# EAGLE board Qwiic PHT Sensor - MS8607-Panel (EAGLE 9.5.2), part 1 of 4
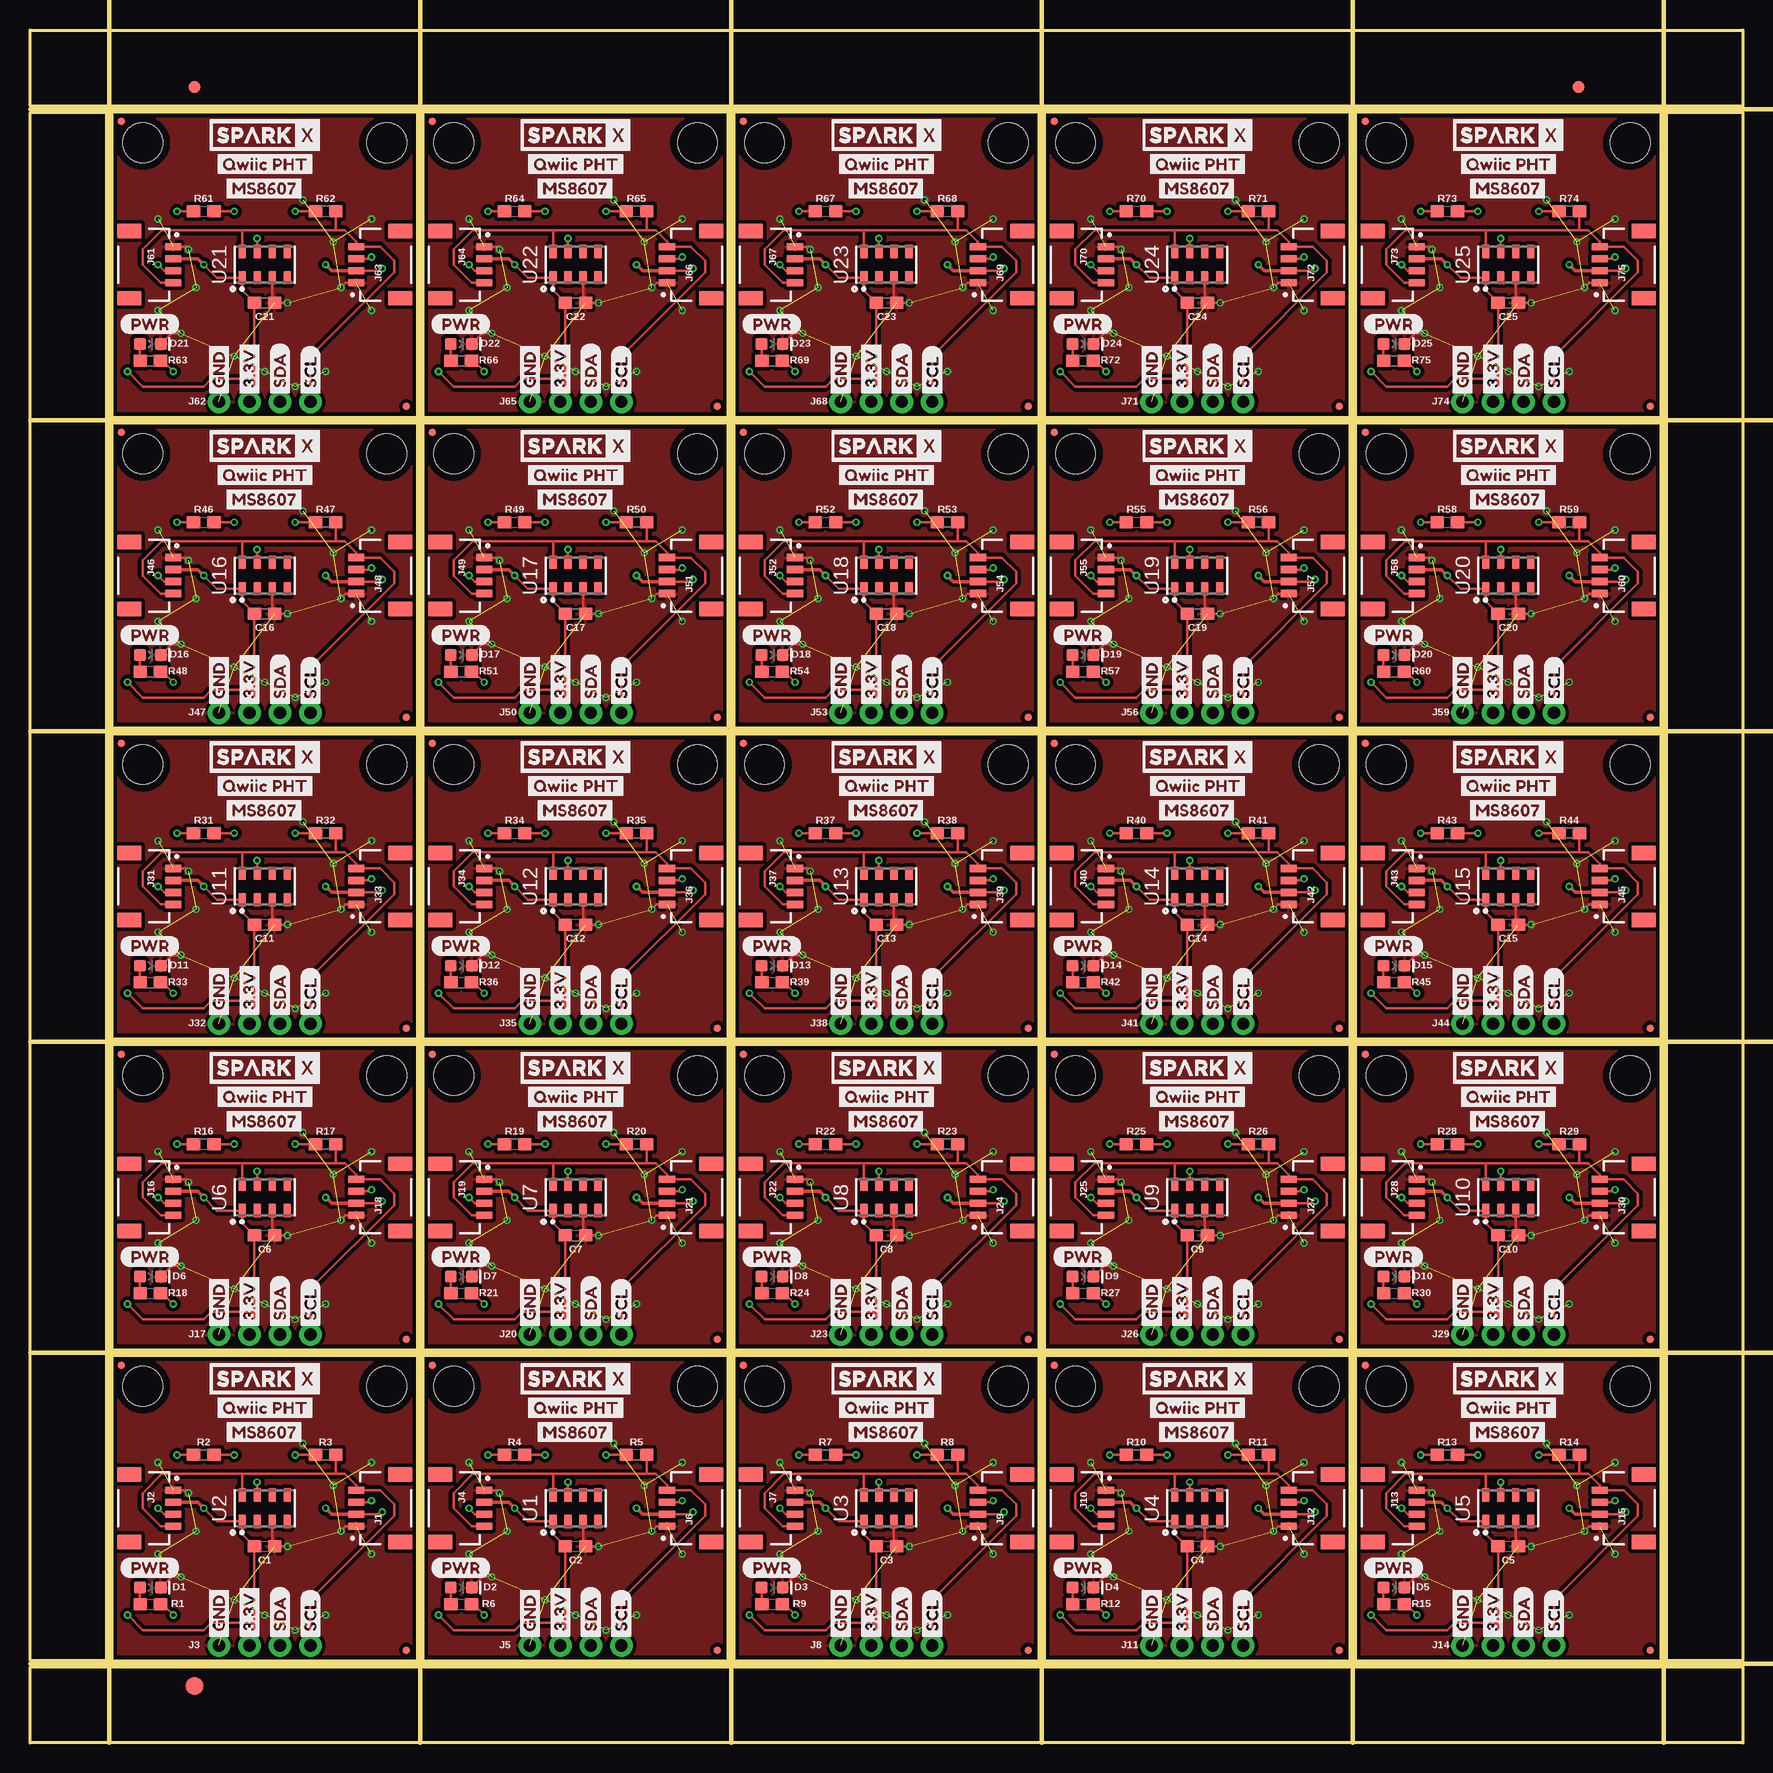
[diagram p0: board, top side]
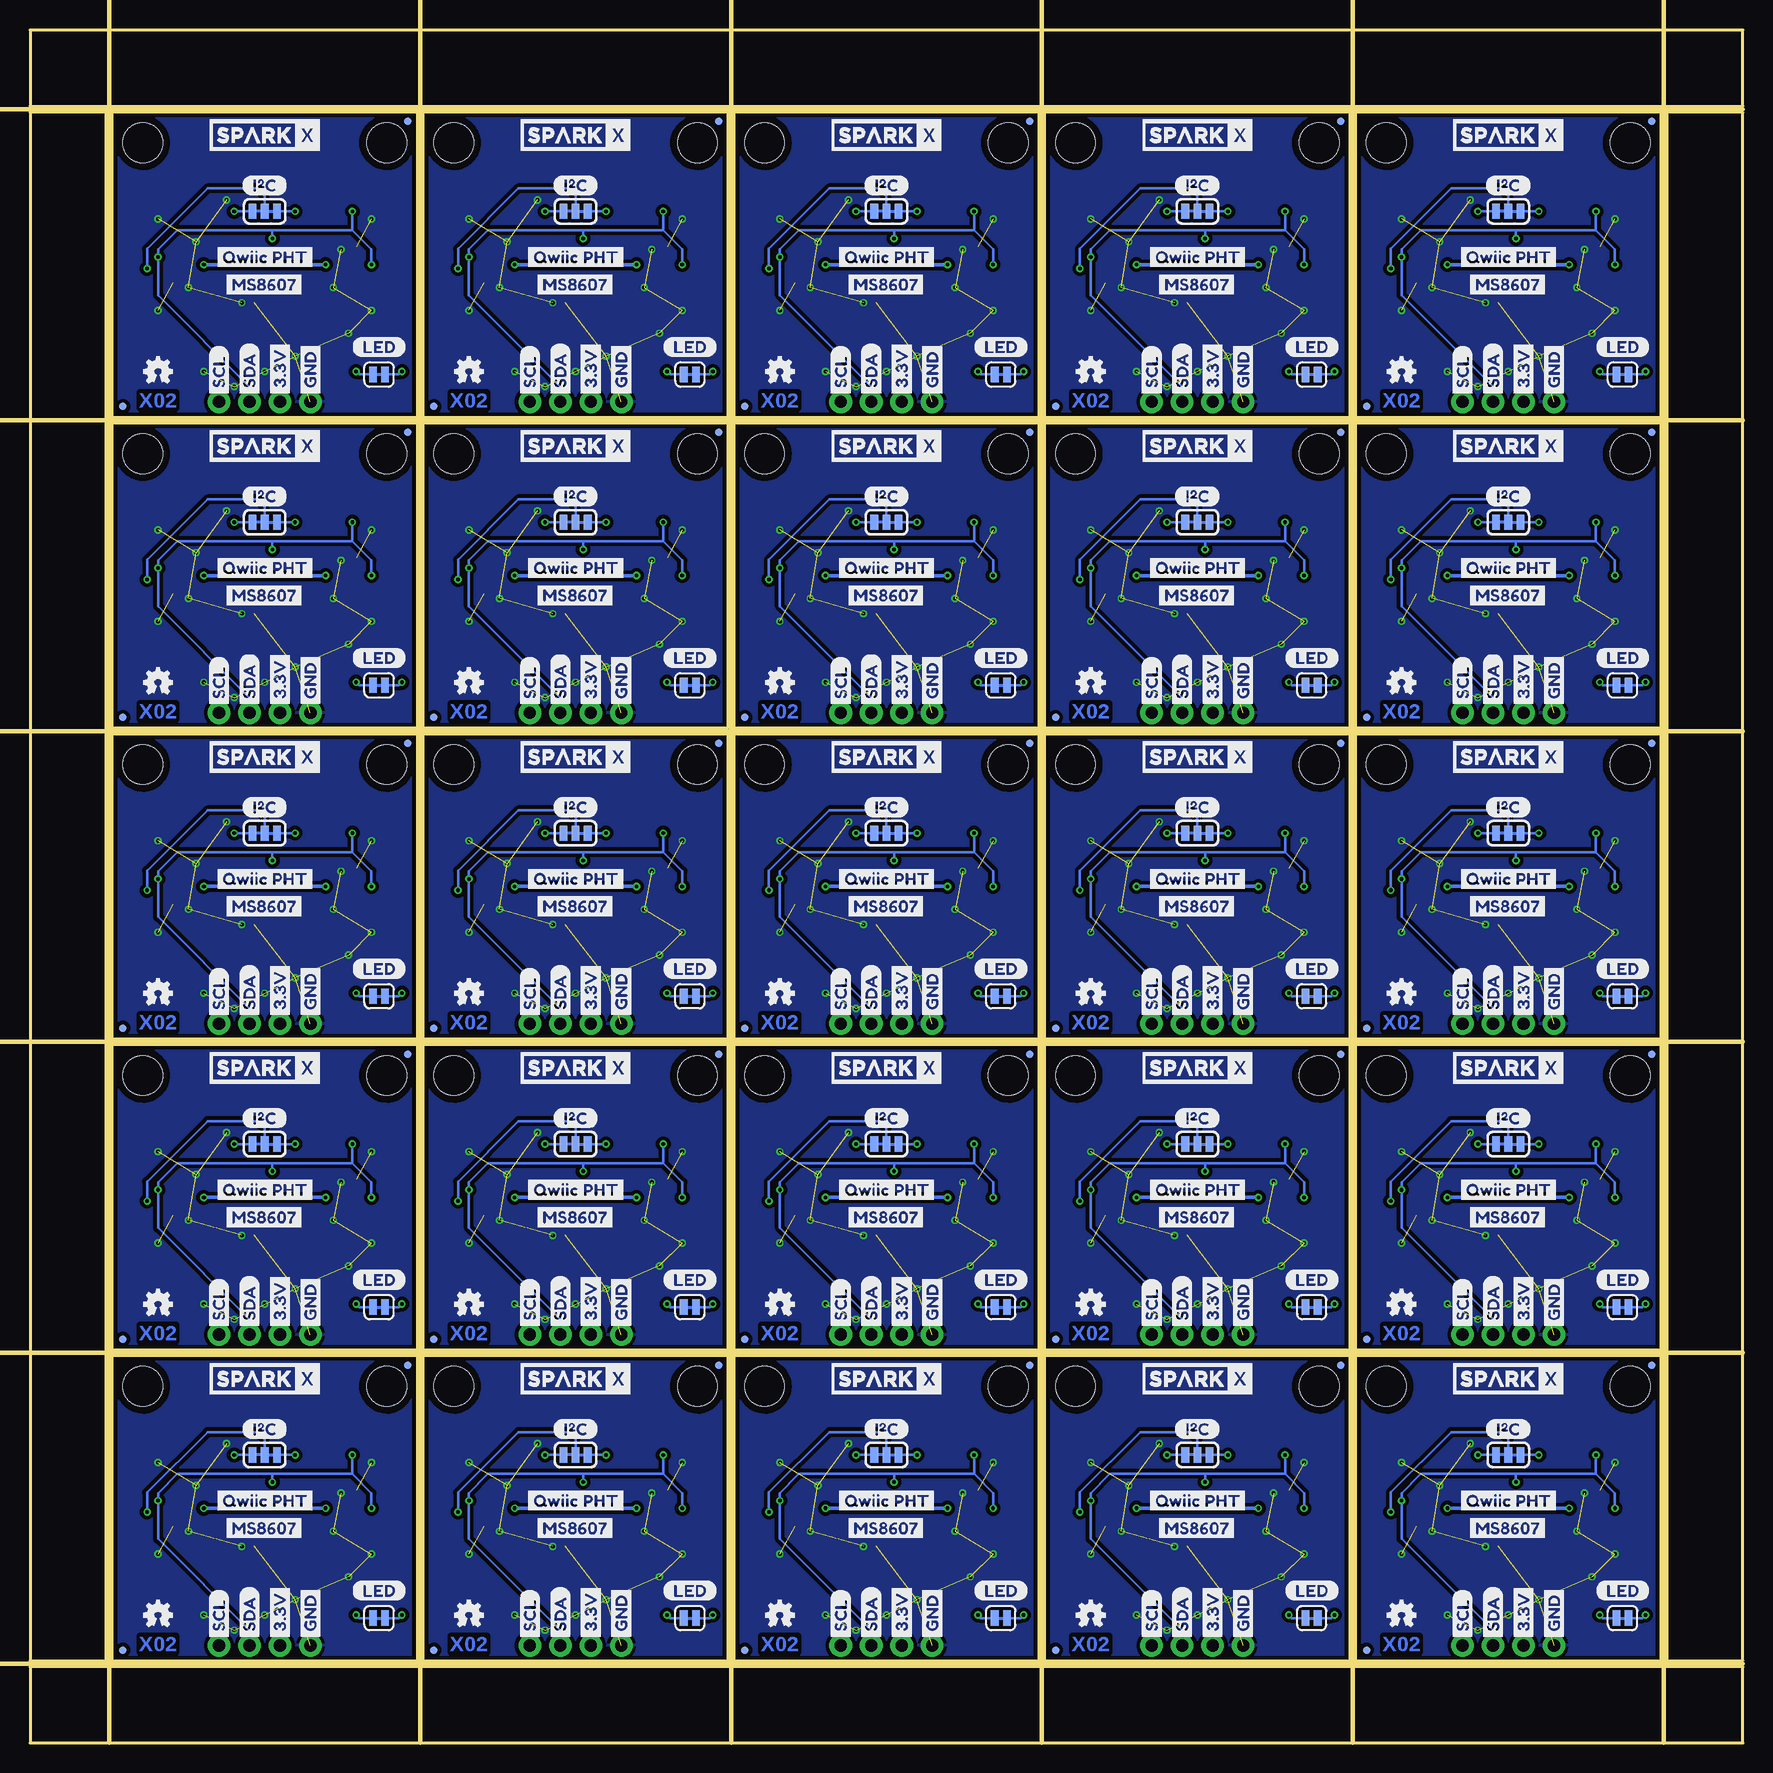
[diagram p1: board, bottom side, seen from below]

Size 142.75 x 142.75 mm. Coordinates in mm from the lower left corner, seen from the top.
Outline: 6.86,6.86 6.86,32.26 32.26,32.26 32.26,6.86 6.86,6.86
Outline: 32.77,6.86 32.77,32.26 58.17,32.26 58.17,6.86 32.77,6.86
Outline: 58.67,6.86 58.67,32.26 84.07,32.26 84.07,6.86 58.67,6.86
Outline: 84.58,6.86 84.58,32.26 109.98,32.26 109.98,6.86 84.58,6.86
Outline: 110.49,6.86 110.49,32.26 135.89,32.26 135.89,6.86 110.49,6.86
Outline: 6.86,32.77 6.86,58.17 32.26,58.17 32.26,32.77 6.86,32.77
Outline: 32.77,32.77 32.77,58.17 58.17,58.17 58.17,32.77 32.77,32.77
Outline: 58.67,32.77 58.67,58.17 84.07,58.17 84.07,32.77 58.67,32.77
Outline: 84.58,32.77 84.58,58.17 109.98,58.17 109.98,32.77 84.58,32.77
Outline: 110.49,32.77 110.49,58.17 135.89,58.17 135.89,32.77 110.49,32.77
Outline: 6.86,58.67 6.86,84.07 32.26,84.07 32.26,58.67 6.86,58.67
Outline: 32.77,58.67 32.77,84.07 58.17,84.07 58.17,58.67 32.77,58.67
Outline: 58.67,58.67 58.67,84.07 84.07,84.07 84.07,58.67 58.67,58.67
Outline: 84.58,58.67 84.58,84.07 109.98,84.07 109.98,58.67 84.58,58.67
Outline: 110.49,58.67 110.49,84.07 135.89,84.07 135.89,58.67 110.49,58.67
Outline: 6.86,84.58 6.86,109.98 32.26,109.98 32.26,84.58 6.86,84.58
Outline: 32.77,84.58 32.77,109.98 58.17,109.98 58.17,84.58 32.77,84.58
Outline: 58.67,84.58 58.67,109.98 84.07,109.98 84.07,84.58 58.67,84.58
Outline: 84.58,84.58 84.58,109.98 109.98,109.98 109.98,84.58 84.58,84.58
Outline: 110.49,84.58 110.49,109.98 135.89,109.98 135.89,84.58 110.49,84.58
Outline: 6.86,110.49 6.86,135.89 32.26,135.89 32.26,110.49 6.86,110.49
Outline: 32.77,110.49 32.77,135.89 58.17,135.89 58.17,110.49 32.77,110.49
Outline: 58.67,110.49 58.67,135.89 84.07,135.89 84.07,110.49 58.67,110.49
Outline: 84.58,110.49 84.58,135.89 109.98,135.89 109.98,110.49 84.58,110.49
Outline: 110.49,110.49 110.49,135.89 135.89,135.89 135.89,110.49 110.49,110.49
Outline: 0,6.35 142.75,6.35 142.75,0 0,0 0,6.35
Outline: 136.4,135.89 142.75,135.89 142.75,6.86 136.4,6.86 136.4,135.89
Outline: 0,142.75 142.75,142.75 142.75,136.4 0,136.4 0,142.75
Outline: 0,135.89 6.35,135.89 6.35,6.86 0,6.86 0,135.89
Copper layers (1*16): Top 0.035mm / dielectric 1.5mm / Bottom 0.035mm
Design rules "SparkFun-2-layer-PCBWay-LIMIT": minimum track width 6mil, minimum drill 0.3mm, track to track 6mil, track to pad 6mil, pad to pad 6mil, via to via 6mil, smd to smd 6mil, copper to edge 6mil, drill to drill 6mil, minimum pad ring 6mil, minimum via ring 6mil, stop-mask expansion 4mil, vias tented up to drill 25mil, thermal gap 10mil
Milling: 12 lines

## Footprints (pad centres in the part's own frame; a part is rotated, then mirrored left to right if it is on the bottom)
0603 = smd 1.1 x 1: 1 -0.85,0; 2 0.85,0
LED-0603 = smd 1 x 1: A -0.877,0; C 0.877,0
FIDUCIAL-1X2 = smd 1 x 1: 1 0,0
FIDUCIAL-1.5X3 = smd 1.5 x 1.5: 1 0,0
SMT-JUMPER_3_2-NC_TRACE_SILK = smd 0.635 x 1.27: 1 -1.016,0; 2 0,0; 3 1.016,0
JST04_1MM_RA = smd 0.6 x 1.35: 1 -1.5,0; 2 -0.5,0; 3 0.5,0; 4 1.5,0 | smd 1.2 x 2: NC1 2.8,-3.675; NC2 -2.8,-3.675
1X04_NO_SILK = drill 1.016 pad 1.88: 1 0,0; 2 2.54,0; 3 5.08,0; 4 7.62,0
MICRO-FIDUCIAL = smd 0.635 x 0.635: 1 0,0
STAND-OFF = hole 3.302: 0,0
SMT-JUMPER_2_NC_TRACE_SILK = smd 0.635 x 1.27: 1 -0.508,0; 2 0.508,0
MS8607-02BA01 = smd 1.1 x 0.6: 1 -1.1,1.875; 2 -1.1,0.625; 3 -1.1,-0.625; 4 -1.1,-1.875; 5 1.1,-1.875; 6 1.1,-0.625; 7 1.1,0.625; 8 1.1,1.875

## Placement (x,y rotation side)
C1  0.22uF  [0603]  19.56,16.38 0 top
C2  0.22uF  [0603]  45.47,16.38 0 top
C3  0.22uF  [0603]  71.37,16.38 0 top
C4  0.22uF  [0603]  97.28,16.38 0 top
C5  0.22uF  [0603]  123.19,16.38 0 top
C6  0.22uF  [0603]  19.56,42.29 0 top
C7  0.22uF  [0603]  45.47,42.29 0 top
C8  0.22uF  [0603]  71.37,42.29 0 top
C9  0.22uF  [0603]  97.28,42.29 0 top
C10  0.22uF  [0603]  123.19,42.29 0 top
C11  0.22uF  [0603]  19.56,68.2 0 top
C12  0.22uF  [0603]  45.47,68.2 0 top
C13  0.22uF  [0603]  71.37,68.2 0 top
C14  0.22uF  [0603]  97.28,68.2 0 top
C15  0.22uF  [0603]  123.19,68.2 0 top
C16  0.22uF  [0603]  19.56,94.11 0 top
C17  0.22uF  [0603]  45.47,94.11 0 top
C18  0.22uF  [0603]  71.37,94.11 0 top
C19  0.22uF  [0603]  97.28,94.11 0 top
C20  0.22uF  [0603]  123.19,94.11 0 top
C21  0.22uF  [0603]  19.56,120.02 0 top
C22  0.22uF  [0603]  45.47,120.02 0 top
C23  0.22uF  [0603]  71.37,120.02 0 top
C24  0.22uF  [0603]  97.28,120.02 0 top
C25  0.22uF  [0603]  123.19,120.02 0 top
D1  RED  [LED-0603]  10.03,12.95 0 top
D2  RED  [LED-0603]  35.94,12.95 0 top
D3  RED  [LED-0603]  61.85,12.95 0 top
D4  RED  [LED-0603]  87.76,12.95 0 top
D5  RED  [LED-0603]  113.67,12.95 0 top
D6  RED  [LED-0603]  10.03,38.86 0 top
D7  RED  [LED-0603]  35.94,38.86 0 top
D8  RED  [LED-0603]  61.85,38.86 0 top
D9  RED  [LED-0603]  87.76,38.86 0 top
D10  RED  [LED-0603]  113.67,38.86 0 top
D11  RED  [LED-0603]  10.03,64.77 0 top
D12  RED  [LED-0603]  35.94,64.77 0 top
D13  RED  [LED-0603]  61.85,64.77 0 top
D14  RED  [LED-0603]  87.76,64.77 0 top
D15  RED  [LED-0603]  113.67,64.77 0 top
D16  RED  [LED-0603]  10.03,90.68 0 top
D17  RED  [LED-0603]  35.94,90.68 0 top
D18  RED  [LED-0603]  61.85,90.68 0 top
D19  RED  [LED-0603]  87.76,90.68 0 top
D20  RED  [LED-0603]  113.67,90.68 0 top
D21  RED  [LED-0603]  10.03,116.59 0 top
D22  RED  [LED-0603]  35.94,116.59 0 top
D23  RED  [LED-0603]  61.85,116.59 0 top
D24  RED  [LED-0603]  87.76,116.59 0 top
D25  RED  [LED-0603]  113.67,116.59 0 top
E$1  [FIDUCIAL-1X2]  13.72,137.99 0 top
E$2  [FIDUCIAL-1X2]  129.03,137.99 0 top
E$3  [FIDUCIAL-1.5X3]  13.72,4.76 0 top
I2C  JUMPER-SMT_3_2-NC_TRACE_SILK  [SMT-JUMPER_3_2-NC_TRACE_SILK]  19.56,24 0 bottom
I2C1  JUMPER-SMT_3_2-NC_TRACE_SILK  [SMT-JUMPER_3_2-NC_TRACE_SILK]  45.47,24 0 bottom
I2C2  JUMPER-SMT_3_2-NC_TRACE_SILK  [SMT-JUMPER_3_2-NC_TRACE_SILK]  71.37,24 0 bottom
I2C3  JUMPER-SMT_3_2-NC_TRACE_SILK  [SMT-JUMPER_3_2-NC_TRACE_SILK]  97.28,24 0 bottom
I2C4  JUMPER-SMT_3_2-NC_TRACE_SILK  [SMT-JUMPER_3_2-NC_TRACE_SILK]  123.19,24 0 bottom
I2C5  JUMPER-SMT_3_2-NC_TRACE_SILK  [SMT-JUMPER_3_2-NC_TRACE_SILK]  19.56,49.91 0 bottom
I2C6  JUMPER-SMT_3_2-NC_TRACE_SILK  [SMT-JUMPER_3_2-NC_TRACE_SILK]  45.47,49.91 0 bottom
I2C7  JUMPER-SMT_3_2-NC_TRACE_SILK  [SMT-JUMPER_3_2-NC_TRACE_SILK]  71.37,49.91 0 bottom
I2C8  JUMPER-SMT_3_2-NC_TRACE_SILK  [SMT-JUMPER_3_2-NC_TRACE_SILK]  97.28,49.91 0 bottom
I2C9  JUMPER-SMT_3_2-NC_TRACE_SILK  [SMT-JUMPER_3_2-NC_TRACE_SILK]  123.19,49.91 0 bottom
I2C10  JUMPER-SMT_3_2-NC_TRACE_SILK  [SMT-JUMPER_3_2-NC_TRACE_SILK]  19.56,75.82 0 bottom
I2C11  JUMPER-SMT_3_2-NC_TRACE_SILK  [SMT-JUMPER_3_2-NC_TRACE_SILK]  45.47,75.82 0 bottom
I2C12  JUMPER-SMT_3_2-NC_TRACE_SILK  [SMT-JUMPER_3_2-NC_TRACE_SILK]  71.37,75.82 0 bottom
I2C13  JUMPER-SMT_3_2-NC_TRACE_SILK  [SMT-JUMPER_3_2-NC_TRACE_SILK]  97.28,75.82 0 bottom
I2C14  JUMPER-SMT_3_2-NC_TRACE_SILK  [SMT-JUMPER_3_2-NC_TRACE_SILK]  123.19,75.82 0 bottom
I2C15  JUMPER-SMT_3_2-NC_TRACE_SILK  [SMT-JUMPER_3_2-NC_TRACE_SILK]  19.56,101.73 0 bottom
I2C16  JUMPER-SMT_3_2-NC_TRACE_SILK  [SMT-JUMPER_3_2-NC_TRACE_SILK]  45.47,101.73 0 bottom
I2C17  JUMPER-SMT_3_2-NC_TRACE_SILK  [SMT-JUMPER_3_2-NC_TRACE_SILK]  71.37,101.73 0 bottom
I2C18  JUMPER-SMT_3_2-NC_TRACE_SILK  [SMT-JUMPER_3_2-NC_TRACE_SILK]  97.28,101.73 0 bottom
I2C19  JUMPER-SMT_3_2-NC_TRACE_SILK  [SMT-JUMPER_3_2-NC_TRACE_SILK]  123.19,101.73 0 bottom
I2C20  JUMPER-SMT_3_2-NC_TRACE_SILK  [SMT-JUMPER_3_2-NC_TRACE_SILK]  19.56,127.64 0 bottom
I2C21  JUMPER-SMT_3_2-NC_TRACE_SILK  [SMT-JUMPER_3_2-NC_TRACE_SILK]  45.47,127.64 0 bottom
I2C22  JUMPER-SMT_3_2-NC_TRACE_SILK  [SMT-JUMPER_3_2-NC_TRACE_SILK]  71.37,127.64 0 bottom
I2C23  JUMPER-SMT_3_2-NC_TRACE_SILK  [SMT-JUMPER_3_2-NC_TRACE_SILK]  97.28,127.64 0 bottom
I2C24  JUMPER-SMT_3_2-NC_TRACE_SILK  [SMT-JUMPER_3_2-NC_TRACE_SILK]  123.19,127.64 0 bottom
J1  Qwiic Right Angle  [JST04_1MM_RA]  27.18,19.56 90 top
J2  Qwiic Right Angle  [JST04_1MM_RA]  11.94,19.56 270 top
J3  PTH  [1X04_NO_SILK]  15.75,8.13 0 top
J4  Qwiic Right Angle  [JST04_1MM_RA]  37.85,19.56 270 top
J5  PTH  [1X04_NO_SILK]  41.66,8.13 0 top
J6  Qwiic Right Angle  [JST04_1MM_RA]  53.09,19.56 90 top
J7  Qwiic Right Angle  [JST04_1MM_RA]  63.75,19.56 270 top
J8  PTH  [1X04_NO_SILK]  67.56,8.13 0 top
J9  Qwiic Right Angle  [JST04_1MM_RA]  78.99,19.56 90 top
J10  Qwiic Right Angle  [JST04_1MM_RA]  89.66,19.56 270 top
J11  PTH  [1X04_NO_SILK]  93.47,8.13 0 top
J12  Qwiic Right Angle  [JST04_1MM_RA]  104.9,19.56 90 top
J13  Qwiic Right Angle  [JST04_1MM_RA]  115.57,19.56 270 top
J14  PTH  [1X04_NO_SILK]  119.38,8.13 0 top
J15  Qwiic Right Angle  [JST04_1MM_RA]  130.81,19.56 90 top
J16  Qwiic Right Angle  [JST04_1MM_RA]  11.94,45.47 270 top
J17  PTH  [1X04_NO_SILK]  15.75,34.04 0 top
J18  Qwiic Right Angle  [JST04_1MM_RA]  27.18,45.47 90 top
J19  Qwiic Right Angle  [JST04_1MM_RA]  37.85,45.47 270 top
J20  PTH  [1X04_NO_SILK]  41.66,34.04 0 top
J21  Qwiic Right Angle  [JST04_1MM_RA]  53.09,45.47 90 top
J22  Qwiic Right Angle  [JST04_1MM_RA]  63.75,45.47 270 top
J23  PTH  [1X04_NO_SILK]  67.56,34.04 0 top
J24  Qwiic Right Angle  [JST04_1MM_RA]  78.99,45.47 90 top
J25  Qwiic Right Angle  [JST04_1MM_RA]  89.66,45.47 270 top
J26  PTH  [1X04_NO_SILK]  93.47,34.04 0 top
J27  Qwiic Right Angle  [JST04_1MM_RA]  104.9,45.47 90 top
J28  Qwiic Right Angle  [JST04_1MM_RA]  115.57,45.47 270 top
J29  PTH  [1X04_NO_SILK]  119.38,34.04 0 top
J30  Qwiic Right Angle  [JST04_1MM_RA]  130.81,45.47 90 top
J31  Qwiic Right Angle  [JST04_1MM_RA]  11.94,71.37 270 top
J32  PTH  [1X04_NO_SILK]  15.75,59.94 0 top
J33  Qwiic Right Angle  [JST04_1MM_RA]  27.18,71.37 90 top
J34  Qwiic Right Angle  [JST04_1MM_RA]  37.85,71.37 270 top
J35  PTH  [1X04_NO_SILK]  41.66,59.94 0 top
J36  Qwiic Right Angle  [JST04_1MM_RA]  53.09,71.37 90 top
J37  Qwiic Right Angle  [JST04_1MM_RA]  63.75,71.37 270 top
J38  PTH  [1X04_NO_SILK]  67.56,59.94 0 top
J39  Qwiic Right Angle  [JST04_1MM_RA]  78.99,71.37 90 top
J40  Qwiic Right Angle  [JST04_1MM_RA]  89.66,71.37 270 top
J41  PTH  [1X04_NO_SILK]  93.47,59.94 0 top
J42  Qwiic Right Angle  [JST04_1MM_RA]  104.9,71.37 90 top
J43  Qwiic Right Angle  [JST04_1MM_RA]  115.57,71.37 270 top
J44  PTH  [1X04_NO_SILK]  119.38,59.94 0 top
J45  Qwiic Right Angle  [JST04_1MM_RA]  130.81,71.37 90 top
J46  Qwiic Right Angle  [JST04_1MM_RA]  11.94,97.28 270 top
J47  PTH  [1X04_NO_SILK]  15.75,85.85 0 top
J48  Qwiic Right Angle  [JST04_1MM_RA]  27.18,97.28 90 top
J49  Qwiic Right Angle  [JST04_1MM_RA]  37.85,97.28 270 top
J50  PTH  [1X04_NO_SILK]  41.66,85.85 0 top
J51  Qwiic Right Angle  [JST04_1MM_RA]  53.09,97.28 90 top
J52  Qwiic Right Angle  [JST04_1MM_RA]  63.75,97.28 270 top
J53  PTH  [1X04_NO_SILK]  67.56,85.85 0 top
J54  Qwiic Right Angle  [JST04_1MM_RA]  78.99,97.28 90 top
J55  Qwiic Right Angle  [JST04_1MM_RA]  89.66,97.28 270 top
J56  PTH  [1X04_NO_SILK]  93.47,85.85 0 top
J57  Qwiic Right Angle  [JST04_1MM_RA]  104.9,97.28 90 top
J58  Qwiic Right Angle  [JST04_1MM_RA]  115.57,97.28 270 top
J59  PTH  [1X04_NO_SILK]  119.38,85.85 0 top
J60  Qwiic Right Angle  [JST04_1MM_RA]  130.81,97.28 90 top
J61  Qwiic Right Angle  [JST04_1MM_RA]  11.94,123.19 270 top
J62  PTH  [1X04_NO_SILK]  15.75,111.76 0 top
J63  Qwiic Right Angle  [JST04_1MM_RA]  27.18,123.19 90 top
J64  Qwiic Right Angle  [JST04_1MM_RA]  37.85,123.19 270 top
J65  PTH  [1X04_NO_SILK]  41.66,111.76 0 top
J66  Qwiic Right Angle  [JST04_1MM_RA]  53.09,123.19 90 top
J67  Qwiic Right Angle  [JST04_1MM_RA]  63.75,123.19 270 top
J68  PTH  [1X04_NO_SILK]  67.56,111.76 0 top
J69  Qwiic Right Angle  [JST04_1MM_RA]  78.99,123.19 90 top
J70  Qwiic Right Angle  [JST04_1MM_RA]  89.66,123.19 270 top
J71  PTH  [1X04_NO_SILK]  93.47,111.76 0 top
J72  Qwiic Right Angle  [JST04_1MM_RA]  104.9,123.19 90 top
J73  Qwiic Right Angle  [JST04_1MM_RA]  115.57,123.19 270 top
J74  PTH  [1X04_NO_SILK]  119.38,111.76 0 top
J75  Qwiic Right Angle  [JST04_1MM_RA]  130.81,123.19 90 top
JP1  FIDUCIALUFIDUCIAL  [MICRO-FIDUCIAL]  7.62,31.5 0 bottom
JP2  FIDUCIALUFIDUCIAL  [MICRO-FIDUCIAL]  31.37,7.75 0 top
JP3  STAND-OFF  [STAND-OFF]  9.4,29.72 0 top
JP4  STAND-OFF  [STAND-OFF]  29.72,29.72 0 top
JP5  FIDUCIALUFIDUCIAL  [MICRO-FIDUCIAL]  31.37,7.75 0 bottom
JP6  FIDUCIALUFIDUCIAL  [MICRO-FIDUCIAL]  7.62,31.5 0 top
JP7  STAND-OFF  [STAND-OFF]  35.31,29.72 0 top
JP8  STAND-OFF  [STAND-OFF]  55.63,29.72 0 top
JP9  FIDUCIALUFIDUCIAL  [MICRO-FIDUCIAL]  57.28,7.75 0 top
JP10  FIDUCIALUFIDUCIAL  [MICRO-FIDUCIAL]  33.53,31.5 0 top
JP11  FIDUCIALUFIDUCIAL  [MICRO-FIDUCIAL]  33.53,31.5 0 bottom
JP12  FIDUCIALUFIDUCIAL  [MICRO-FIDUCIAL]  57.28,7.75 0 bottom
JP13  STAND-OFF  [STAND-OFF]  61.21,29.72 0 top
JP14  STAND-OFF  [STAND-OFF]  81.53,29.72 0 top
JP15  FIDUCIALUFIDUCIAL  [MICRO-FIDUCIAL]  83.19,7.75 0 top
JP16  FIDUCIALUFIDUCIAL  [MICRO-FIDUCIAL]  59.44,31.5 0 top
JP17  FIDUCIALUFIDUCIAL  [MICRO-FIDUCIAL]  59.44,31.5 0 bottom
JP18  FIDUCIALUFIDUCIAL  [MICRO-FIDUCIAL]  83.19,7.75 0 bottom
JP19  STAND-OFF  [STAND-OFF]  87.12,29.72 0 top
JP20  STAND-OFF  [STAND-OFF]  107.44,29.72 0 top
JP21  FIDUCIALUFIDUCIAL  [MICRO-FIDUCIAL]  109.09,7.75 0 top
JP22  FIDUCIALUFIDUCIAL  [MICRO-FIDUCIAL]  85.34,31.5 0 top
JP23  FIDUCIALUFIDUCIAL  [MICRO-FIDUCIAL]  85.34,31.5 0 bottom
JP24  FIDUCIALUFIDUCIAL  [MICRO-FIDUCIAL]  109.09,7.75 0 bottom
JP25  STAND-OFF  [STAND-OFF]  113.03,29.72 0 top
JP26  STAND-OFF  [STAND-OFF]  133.35,29.72 0 top
JP27  FIDUCIALUFIDUCIAL  [MICRO-FIDUCIAL]  135,7.75 0 top
JP28  FIDUCIALUFIDUCIAL  [MICRO-FIDUCIAL]  111.25,31.5 0 top
JP29  FIDUCIALUFIDUCIAL  [MICRO-FIDUCIAL]  111.25,31.5 0 bottom
JP30  FIDUCIALUFIDUCIAL  [MICRO-FIDUCIAL]  135,7.75 0 bottom
JP31  STAND-OFF  [STAND-OFF]  9.4,55.63 0 top
JP32  STAND-OFF  [STAND-OFF]  29.72,55.63 0 top
JP33  FIDUCIALUFIDUCIAL  [MICRO-FIDUCIAL]  31.37,33.66 0 top
JP34  FIDUCIALUFIDUCIAL  [MICRO-FIDUCIAL]  7.62,57.4 0 top
JP35  FIDUCIALUFIDUCIAL  [MICRO-FIDUCIAL]  7.62,57.4 0 bottom
JP36  FIDUCIALUFIDUCIAL  [MICRO-FIDUCIAL]  31.37,33.66 0 bottom
JP37  STAND-OFF  [STAND-OFF]  35.31,55.63 0 top
JP38  STAND-OFF  [STAND-OFF]  55.63,55.63 0 top
JP39  FIDUCIALUFIDUCIAL  [MICRO-FIDUCIAL]  57.28,33.66 0 top
JP40  FIDUCIALUFIDUCIAL  [MICRO-FIDUCIAL]  33.53,57.4 0 top
JP41  FIDUCIALUFIDUCIAL  [MICRO-FIDUCIAL]  33.53,57.4 0 bottom
JP42  FIDUCIALUFIDUCIAL  [MICRO-FIDUCIAL]  57.28,33.66 0 bottom
JP43  STAND-OFF  [STAND-OFF]  61.21,55.63 0 top
JP44  STAND-OFF  [STAND-OFF]  81.53,55.63 0 top
JP45  FIDUCIALUFIDUCIAL  [MICRO-FIDUCIAL]  83.19,33.66 0 top
JP46  FIDUCIALUFIDUCIAL  [MICRO-FIDUCIAL]  59.44,57.4 0 top
JP47  FIDUCIALUFIDUCIAL  [MICRO-FIDUCIAL]  59.44,57.4 0 bottom
JP48  FIDUCIALUFIDUCIAL  [MICRO-FIDUCIAL]  83.19,33.66 0 bottom
JP49  STAND-OFF  [STAND-OFF]  87.12,55.63 0 top
JP50  STAND-OFF  [STAND-OFF]  107.44,55.63 0 top
JP51  FIDUCIALUFIDUCIAL  [MICRO-FIDUCIAL]  109.09,33.66 0 top
JP52  FIDUCIALUFIDUCIAL  [MICRO-FIDUCIAL]  85.34,57.4 0 top
JP53  FIDUCIALUFIDUCIAL  [MICRO-FIDUCIAL]  85.34,57.4 0 bottom
JP54  FIDUCIALUFIDUCIAL  [MICRO-FIDUCIAL]  109.09,33.66 0 bottom
JP55  STAND-OFF  [STAND-OFF]  113.03,55.63 0 top
JP56  STAND-OFF  [STAND-OFF]  133.35,55.63 0 top
JP57  FIDUCIALUFIDUCIAL  [MICRO-FIDUCIAL]  135,33.66 0 top
JP58  FIDUCIALUFIDUCIAL  [MICRO-FIDUCIAL]  111.25,57.4 0 top
JP59  FIDUCIALUFIDUCIAL  [MICRO-FIDUCIAL]  111.25,57.4 0 bottom
JP60  FIDUCIALUFIDUCIAL  [MICRO-FIDUCIAL]  135,33.66 0 bottom
JP61  STAND-OFF  [STAND-OFF]  9.4,81.53 0 top
JP62  STAND-OFF  [STAND-OFF]  29.72,81.53 0 top
JP63  FIDUCIALUFIDUCIAL  [MICRO-FIDUCIAL]  31.37,59.56 0 top
JP64  FIDUCIALUFIDUCIAL  [MICRO-FIDUCIAL]  7.62,83.31 0 top
JP65  FIDUCIALUFIDUCIAL  [MICRO-FIDUCIAL]  7.62,83.31 0 bottom
JP66  FIDUCIALUFIDUCIAL  [MICRO-FIDUCIAL]  31.37,59.56 0 bottom
JP67  STAND-OFF  [STAND-OFF]  35.31,81.53 0 top
JP68  STAND-OFF  [STAND-OFF]  55.63,81.53 0 top
JP69  FIDUCIALUFIDUCIAL  [MICRO-FIDUCIAL]  57.28,59.56 0 top
JP70  FIDUCIALUFIDUCIAL  [MICRO-FIDUCIAL]  33.53,83.31 0 top
JP71  FIDUCIALUFIDUCIAL  [MICRO-FIDUCIAL]  33.53,83.31 0 bottom
JP72  FIDUCIALUFIDUCIAL  [MICRO-FIDUCIAL]  57.28,59.56 0 bottom
JP73  STAND-OFF  [STAND-OFF]  61.21,81.53 0 top
JP74  STAND-OFF  [STAND-OFF]  81.53,81.53 0 top
JP75  FIDUCIALUFIDUCIAL  [MICRO-FIDUCIAL]  83.19,59.56 0 top
JP76  FIDUCIALUFIDUCIAL  [MICRO-FIDUCIAL]  59.44,83.31 0 top
JP77  FIDUCIALUFIDUCIAL  [MICRO-FIDUCIAL]  59.44,83.31 0 bottom
JP78  FIDUCIALUFIDUCIAL  [MICRO-FIDUCIAL]  83.19,59.56 0 bottom
JP79  STAND-OFF  [STAND-OFF]  87.12,81.53 0 top
JP80  STAND-OFF  [STAND-OFF]  107.44,81.53 0 top
JP81  FIDUCIALUFIDUCIAL  [MICRO-FIDUCIAL]  109.09,59.56 0 top
JP82  FIDUCIALUFIDUCIAL  [MICRO-FIDUCIAL]  85.34,83.31 0 top
JP83  FIDUCIALUFIDUCIAL  [MICRO-FIDUCIAL]  85.34,83.31 0 bottom
JP84  FIDUCIALUFIDUCIAL  [MICRO-FIDUCIAL]  109.09,59.56 0 bottom
JP85  STAND-OFF  [STAND-OFF]  113.03,81.53 0 top
JP86  STAND-OFF  [STAND-OFF]  133.35,81.53 0 top
JP87  FIDUCIALUFIDUCIAL  [MICRO-FIDUCIAL]  135,59.56 0 top
JP88  FIDUCIALUFIDUCIAL  [MICRO-FIDUCIAL]  111.25,83.31 0 top
JP89  FIDUCIALUFIDUCIAL  [MICRO-FIDUCIAL]  111.25,83.31 0 bottom
JP90  FIDUCIALUFIDUCIAL  [MICRO-FIDUCIAL]  135,59.56 0 bottom
JP91  STAND-OFF  [STAND-OFF]  9.4,107.44 0 top
JP92  STAND-OFF  [STAND-OFF]  29.72,107.44 0 top
JP93  FIDUCIALUFIDUCIAL  [MICRO-FIDUCIAL]  31.37,85.47 0 top
JP94  FIDUCIALUFIDUCIAL  [MICRO-FIDUCIAL]  7.62,109.22 0 top
JP95  FIDUCIALUFIDUCIAL  [MICRO-FIDUCIAL]  7.62,109.22 0 bottom
JP96  FIDUCIALUFIDUCIAL  [MICRO-FIDUCIAL]  31.37,85.47 0 bottom
JP97  STAND-OFF  [STAND-OFF]  35.31,107.44 0 top
JP98  STAND-OFF  [STAND-OFF]  55.63,107.44 0 top
JP99  FIDUCIALUFIDUCIAL  [MICRO-FIDUCIAL]  57.28,85.47 0 top
JP100  FIDUCIALUFIDUCIAL  [MICRO-FIDUCIAL]  33.53,109.22 0 top
JP101  FIDUCIALUFIDUCIAL  [MICRO-FIDUCIAL]  33.53,109.22 0 bottom
JP102  FIDUCIALUFIDUCIAL  [MICRO-FIDUCIAL]  57.28,85.47 0 bottom
JP103  STAND-OFF  [STAND-OFF]  61.21,107.44 0 top
JP104  STAND-OFF  [STAND-OFF]  81.53,107.44 0 top
JP105  FIDUCIALUFIDUCIAL  [MICRO-FIDUCIAL]  83.19,85.47 0 top
JP106  FIDUCIALUFIDUCIAL  [MICRO-FIDUCIAL]  59.44,109.22 0 top
JP107  FIDUCIALUFIDUCIAL  [MICRO-FIDUCIAL]  59.44,109.22 0 bottom
JP108  FIDUCIALUFIDUCIAL  [MICRO-FIDUCIAL]  83.19,85.47 0 bottom
JP109  STAND-OFF  [STAND-OFF]  87.12,107.44 0 top
JP110  STAND-OFF  [STAND-OFF]  107.44,107.44 0 top
JP111  FIDUCIALUFIDUCIAL  [MICRO-FIDUCIAL]  109.09,85.47 0 top
JP112  FIDUCIALUFIDUCIAL  [MICRO-FIDUCIAL]  85.34,109.22 0 top
JP113  FIDUCIALUFIDUCIAL  [MICRO-FIDUCIAL]  85.34,109.22 0 bottom
JP114  FIDUCIALUFIDUCIAL  [MICRO-FIDUCIAL]  109.09,85.47 0 bottom
JP115  STAND-OFF  [STAND-OFF]  113.03,107.44 0 top
JP116  STAND-OFF  [STAND-OFF]  133.35,107.44 0 top
JP117  FIDUCIALUFIDUCIAL  [MICRO-FIDUCIAL]  135,85.47 0 top
JP118  FIDUCIALUFIDUCIAL  [MICRO-FIDUCIAL]  111.25,109.22 0 top
JP119  FIDUCIALUFIDUCIAL  [MICRO-FIDUCIAL]  111.25,109.22 0 bottom
JP120  FIDUCIALUFIDUCIAL  [MICRO-FIDUCIAL]  135,85.47 0 bottom
JP121  STAND-OFF  [STAND-OFF]  9.4,133.35 0 top
JP122  STAND-OFF  [STAND-OFF]  29.72,133.35 0 top
JP123  FIDUCIALUFIDUCIAL  [MICRO-FIDUCIAL]  31.37,111.38 0 top
JP124  FIDUCIALUFIDUCIAL  [MICRO-FIDUCIAL]  7.62,135.13 0 top
JP125  FIDUCIALUFIDUCIAL  [MICRO-FIDUCIAL]  7.62,135.13 0 bottom
JP126  FIDUCIALUFIDUCIAL  [MICRO-FIDUCIAL]  31.37,111.38 0 bottom
JP127  STAND-OFF  [STAND-OFF]  35.31,133.35 0 top
JP128  STAND-OFF  [STAND-OFF]  55.63,133.35 0 top
JP129  FIDUCIALUFIDUCIAL  [MICRO-FIDUCIAL]  57.28,111.38 0 top
JP130  FIDUCIALUFIDUCIAL  [MICRO-FIDUCIAL]  33.53,135.13 0 top
JP131  FIDUCIALUFIDUCIAL  [MICRO-FIDUCIAL]  33.53,135.13 0 bottom
JP132  FIDUCIALUFIDUCIAL  [MICRO-FIDUCIAL]  57.28,111.38 0 bottom
JP133  STAND-OFF  [STAND-OFF]  61.21,133.35 0 top
JP134  STAND-OFF  [STAND-OFF]  81.53,133.35 0 top
JP135  FIDUCIALUFIDUCIAL  [MICRO-FIDUCIAL]  83.19,111.38 0 top
JP136  FIDUCIALUFIDUCIAL  [MICRO-FIDUCIAL]  59.44,135.13 0 top
JP137  FIDUCIALUFIDUCIAL  [MICRO-FIDUCIAL]  59.44,135.13 0 bottom
JP138  FIDUCIALUFIDUCIAL  [MICRO-FIDUCIAL]  83.19,111.38 0 bottom
JP139  STAND-OFF  [STAND-OFF]  87.12,133.35 0 top
JP140  STAND-OFF  [STAND-OFF]  107.44,133.35 0 top
JP141  FIDUCIALUFIDUCIAL  [MICRO-FIDUCIAL]  109.09,111.38 0 top
JP142  FIDUCIALUFIDUCIAL  [MICRO-FIDUCIAL]  85.34,135.13 0 top
JP143  FIDUCIALUFIDUCIAL  [MICRO-FIDUCIAL]  85.34,135.13 0 bottom
JP144  FIDUCIALUFIDUCIAL  [MICRO-FIDUCIAL]  109.09,111.38 0 bottom
JP145  STAND-OFF  [STAND-OFF]  113.03,133.35 0 top
JP146  STAND-OFF  [STAND-OFF]  133.35,133.35 0 top
JP147  FIDUCIALUFIDUCIAL  [MICRO-FIDUCIAL]  135,111.38 0 top
JP148  FIDUCIALUFIDUCIAL  [MICRO-FIDUCIAL]  111.25,135.13 0 top
JP149  FIDUCIALUFIDUCIAL  [MICRO-FIDUCIAL]  111.25,135.13 0 bottom
JP150  FIDUCIALUFIDUCIAL  [MICRO-FIDUCIAL]  135,111.38 0 bottom
LED  JUMPER-SMT_2_NC_TRACE_SILK  [SMT-JUMPER_2_NC_TRACE_SILK]  10.03,10.41 0 bottom
LED1  JUMPER-SMT_2_NC_TRACE_SILK  [SMT-JUMPER_2_NC_TRACE_SILK]  35.94,10.41 0 bottom
LED2  JUMPER-SMT_2_NC_TRACE_SILK  [SMT-JUMPER_2_NC_TRACE_SILK]  61.85,10.41 0 bottom
LED3  JUMPER-SMT_2_NC_TRACE_SILK  [SMT-JUMPER_2_NC_TRACE_SILK]  87.76,10.41 0 bottom
LED4  JUMPER-SMT_2_NC_TRACE_SILK  [SMT-JUMPER_2_NC_TRACE_SILK]  113.67,10.41 0 bottom
LED5  JUMPER-SMT_2_NC_TRACE_SILK  [SMT-JUMPER_2_NC_TRACE_SILK]  10.03,36.32 0 bottom
LED6  JUMPER-SMT_2_NC_TRACE_SILK  [SMT-JUMPER_2_NC_TRACE_SILK]  35.94,36.32 0 bottom
LED7  JUMPER-SMT_2_NC_TRACE_SILK  [SMT-JUMPER_2_NC_TRACE_SILK]  61.85,36.32 0 bottom
LED8  JUMPER-SMT_2_NC_TRACE_SILK  [SMT-JUMPER_2_NC_TRACE_SILK]  87.76,36.32 0 bottom
LED9  JUMPER-SMT_2_NC_TRACE_SILK  [SMT-JUMPER_2_NC_TRACE_SILK]  113.67,36.32 0 bottom
LED10  JUMPER-SMT_2_NC_TRACE_SILK  [SMT-JUMPER_2_NC_TRACE_SILK]  10.03,62.23 0 bottom
LED11  JUMPER-SMT_2_NC_TRACE_SILK  [SMT-JUMPER_2_NC_TRACE_SILK]  35.94,62.23 0 bottom
LED12  JUMPER-SMT_2_NC_TRACE_SILK  [SMT-JUMPER_2_NC_TRACE_SILK]  61.85,62.23 0 bottom
LED13  JUMPER-SMT_2_NC_TRACE_SILK  [SMT-JUMPER_2_NC_TRACE_SILK]  87.76,62.23 0 bottom
LED14  JUMPER-SMT_2_NC_TRACE_SILK  [SMT-JUMPER_2_NC_TRACE_SILK]  113.67,62.23 0 bottom
LED15  JUMPER-SMT_2_NC_TRACE_SILK  [SMT-JUMPER_2_NC_TRACE_SILK]  10.03,88.14 0 bottom
LED16  JUMPER-SMT_2_NC_TRACE_SILK  [SMT-JUMPER_2_NC_TRACE_SILK]  35.94,88.14 0 bottom
LED17  JUMPER-SMT_2_NC_TRACE_SILK  [SMT-JUMPER_2_NC_TRACE_SILK]  61.85,88.14 0 bottom
LED18  JUMPER-SMT_2_NC_TRACE_SILK  [SMT-JUMPER_2_NC_TRACE_SILK]  87.76,88.14 0 bottom
LED19  JUMPER-SMT_2_NC_TRACE_SILK  [SMT-JUMPER_2_NC_TRACE_SILK]  113.67,88.14 0 bottom
LED20  JUMPER-SMT_2_NC_TRACE_SILK  [SMT-JUMPER_2_NC_TRACE_SILK]  10.03,114.05 0 bottom
LED21  JUMPER-SMT_2_NC_TRACE_SILK  [SMT-JUMPER_2_NC_TRACE_SILK]  35.94,114.05 0 bottom
LED22  JUMPER-SMT_2_NC_TRACE_SILK  [SMT-JUMPER_2_NC_TRACE_SILK]  61.85,114.05 0 bottom
LED23  JUMPER-SMT_2_NC_TRACE_SILK  [SMT-JUMPER_2_NC_TRACE_SILK]  87.76,114.05 0 bottom
LED24  JUMPER-SMT_2_NC_TRACE_SILK  [SMT-JUMPER_2_NC_TRACE_SILK]  113.67,114.05 0 bottom
LOGO1  OSHW-LOGOMINI  [OSHW-LOGO-MINI]  28.45,10.67 0 bottom
LOGO2  OSHW-LOGOMINI  [OSHW-LOGO-MINI]  54.36,10.67 0 bottom
LOGO3  OSHW-LOGOMINI  [OSHW-LOGO-MINI]  80.26,10.67 0 bottom
LOGO4  OSHW-LOGOMINI  [OSHW-LOGO-MINI]  106.17,10.67 0 bottom
LOGO5  OSHW-LOGOMINI  [OSHW-LOGO-MINI]  132.08,10.67 0 bottom
LOGO6  OSHW-LOGOMINI  [OSHW-LOGO-MINI]  28.45,36.58 0 bottom
LOGO7  OSHW-LOGOMINI  [OSHW-LOGO-MINI]  54.36,36.58 0 bottom
LOGO8  OSHW-LOGOMINI  [OSHW-LOGO-MINI]  80.26,36.58 0 bottom
LOGO9  OSHW-LOGOMINI  [OSHW-LOGO-MINI]  106.17,36.58 0 bottom
LOGO10  OSHW-LOGOMINI  [OSHW-LOGO-MINI]  132.08,36.58 0 bottom
LOGO11  OSHW-LOGOMINI  [OSHW-LOGO-MINI]  28.45,62.48 0 bottom
LOGO12  OSHW-LOGOMINI  [OSHW-LOGO-MINI]  54.36,62.48 0 bottom
LOGO13  OSHW-LOGOMINI  [OSHW-LOGO-MINI]  80.26,62.48 0 bottom
LOGO14  OSHW-LOGOMINI  [OSHW-LOGO-MINI]  106.17,62.48 0 bottom
LOGO15  OSHW-LOGOMINI  [OSHW-LOGO-MINI]  132.08,62.48 0 bottom
LOGO16  OSHW-LOGOMINI  [OSHW-LOGO-MINI]  28.45,88.39 0 bottom
LOGO17  OSHW-LOGOMINI  [OSHW-LOGO-MINI]  54.36,88.39 0 bottom
LOGO18  OSHW-LOGOMINI  [OSHW-LOGO-MINI]  80.26,88.39 0 bottom
LOGO19  OSHW-LOGOMINI  [OSHW-LOGO-MINI]  106.17,88.39 0 bottom
LOGO20  OSHW-LOGOMINI  [OSHW-LOGO-MINI]  132.08,88.39 0 bottom
LOGO21  OSHW-LOGOMINI  [OSHW-LOGO-MINI]  28.45,114.3 0 bottom
LOGO22  OSHW-LOGOMINI  [OSHW-LOGO-MINI]  54.36,114.3 0 bottom
LOGO23  OSHW-LOGOMINI  [OSHW-LOGO-MINI]  80.26,114.3 0 bottom
LOGO24  OSHW-LOGOMINI  [OSHW-LOGO-MINI]  106.17,114.3 0 bottom
LOGO25  OSHW-LOGOMINI  [OSHW-LOGO-MINI]  132.08,114.3 0 bottom
R1  1k  [0603]  10.03,11.56 0 top
R2  2.2k  [0603]  14.48,24 0 top
R3  2.2k  [0603]  24.64,24 180 top
R4  2.2k  [0603]  40.39,24 0 top
R5  2.2k  [0603]  50.55,24 180 top
R6  1k  [0603]  35.94,11.56 0 top
R7  2.2k  [0603]  66.29,24 0 top
R8  2.2k  [0603]  76.45,24 180 top
R9  1k  [0603]  61.85,11.56 0 top
R10  2.2k  [0603]  92.2,24 0 top
R11  2.2k  [0603]  102.36,24 180 top
R12  1k  [0603]  87.76,11.56 0 top
R13  2.2k  [0603]  118.11,24 0 top
R14  2.2k  [0603]  128.27,24 180 top
R15  1k  [0603]  113.67,11.56 0 top
R16  2.2k  [0603]  14.48,49.91 0 top
R17  2.2k  [0603]  24.64,49.91 180 top
R18  1k  [0603]  10.03,37.46 0 top
R19  2.2k  [0603]  40.39,49.91 0 top
R20  2.2k  [0603]  50.55,49.91 180 top
R21  1k  [0603]  35.94,37.46 0 top
R22  2.2k  [0603]  66.29,49.91 0 top
R23  2.2k  [0603]  76.45,49.91 180 top
R24  1k  [0603]  61.85,37.46 0 top
R25  2.2k  [0603]  92.2,49.91 0 top
R26  2.2k  [0603]  102.36,49.91 180 top
R27  1k  [0603]  87.76,37.46 0 top
R28  2.2k  [0603]  118.11,49.91 0 top
R29  2.2k  [0603]  128.27,49.91 180 top
R30  1k  [0603]  113.67,37.46 0 top
R31  2.2k  [0603]  14.48,75.82 0 top
R32  2.2k  [0603]  24.64,75.82 180 top
R33  1k  [0603]  10.03,63.37 0 top
R34  2.2k  [0603]  40.39,75.82 0 top
R35  2.2k  [0603]  50.55,75.82 180 top
R36  1k  [0603]  35.94,63.37 0 top
R37  2.2k  [0603]  66.29,75.82 0 top
R38  2.2k  [0603]  76.45,75.82 180 top
R39  1k  [0603]  61.85,63.37 0 top
R40  2.2k  [0603]  92.2,75.82 0 top
R41  2.2k  [0603]  102.36,75.82 180 top
R42  1k  [0603]  87.76,63.37 0 top
R43  2.2k  [0603]  118.11,75.82 0 top
R44  2.2k  [0603]  128.27,75.82 180 top
R45  1k  [0603]  113.67,63.37 0 top
R46  2.2k  [0603]  14.48,101.73 0 top
R47  2.2k  [0603]  24.64,101.73 180 top
R48  1k  [0603]  10.03,89.28 0 top
R49  2.2k  [0603]  40.39,101.73 0 top
R50  2.2k  [0603]  50.55,101.73 180 top
R51  1k  [0603]  35.94,89.28 0 top
R52  2.2k  [0603]  66.29,101.73 0 top
R53  2.2k  [0603]  76.45,101.73 180 top
R54  1k  [0603]  61.85,89.28 0 top
R55  2.2k  [0603]  92.2,101.73 0 top
R56  2.2k  [0603]  102.36,101.73 180 top
R57  1k  [0603]  87.76,89.28 0 top
R58  2.2k  [0603]  118.11,101.73 0 top
R59  2.2k  [0603]  128.27,101.73 180 top
R60  1k  [0603]  113.67,89.28 0 top
R61  2.2k  [0603]  14.48,127.64 0 top
R62  2.2k  [0603]  24.64,127.64 180 top
R63  1k  [0603]  10.03,115.19 0 top
R64  2.2k  [0603]  40.39,127.64 0 top
R65  2.2k  [0603]  50.55,127.64 180 top
R66  1k  [0603]  35.94,115.19 0 top
R67  2.2k  [0603]  66.29,127.64 0 top
R68  2.2k  [0603]  76.45,127.64 180 top
R69  1k  [0603]  61.85,115.19 0 top
R70  2.2k  [0603]  92.2,127.64 0 top
R71  2.2k  [0603]  102.36,127.64 180 top
R72  1k  [0603]  87.76,115.19 0 top
R73  2.2k  [0603]  118.11,127.64 0 top
R74  2.2k  [0603]  128.27,127.64 180 top
R75  1k  [0603]  113.67,115.19 0 top
U1  MS8607-02BA01  [MS8607-02BA01]  45.47,19.56 90 top
U2  MS8607-02BA01  [MS8607-02BA01]  19.56,19.56 90 top
U3  MS8607-02BA01  [MS8607-02BA01]  71.37,19.56 90 top
U4  MS8607-02BA01  [MS8607-02BA01]  97.28,19.56 90 top
U5  MS8607-02BA01  [MS8607-02BA01]  123.19,19.56 90 top
U6  MS8607-02BA01  [MS8607-02BA01]  19.56,45.47 90 top
U7  MS8607-02BA01  [MS8607-02BA01]  45.47,45.47 90 top
U8  MS8607-02BA01  [MS8607-02BA01]  71.37,45.47 90 top
U9  MS8607-02BA01  [MS8607-02BA01]  97.28,45.47 90 top
U10  MS8607-02BA01  [MS8607-02BA01]  123.19,45.47 90 top
U11  MS8607-02BA01  [MS8607-02BA01]  19.56,71.37 90 top
U12  MS8607-02BA01  [MS8607-02BA01]  45.47,71.37 90 top
U13  MS8607-02BA01  [MS8607-02BA01]  71.37,71.37 90 top
U14  MS8607-02BA01  [MS8607-02BA01]  97.28,71.37 90 top
U15  MS8607-02BA01  [MS8607-02BA01]  123.19,71.37 90 top
U16  MS8607-02BA01  [MS8607-02BA01]  19.56,97.28 90 top
U17  MS8607-02BA01  [MS8607-02BA01]  45.47,97.28 90 top
U18  MS8607-02BA01  [MS8607-02BA01]  71.37,97.28 90 top
U19  MS8607-02BA01  [MS8607-02BA01]  97.28,97.28 90 top
U20  MS8607-02BA01  [MS8607-02BA01]  123.19,97.28 90 top
U21  MS8607-02BA01  [MS8607-02BA01]  19.56,123.19 90 top
U22  MS8607-02BA01  [MS8607-02BA01]  45.47,123.19 90 top
U23  MS8607-02BA01  [MS8607-02BA01]  71.37,123.19 90 top
U24  MS8607-02BA01  [MS8607-02BA01]  97.28,123.19 90 top
U25  MS8607-02BA01  [MS8607-02BA01]  123.19,123.19 90 top
U$1  SPARKX-LOGO4  [SPARKX-MEDIUM]  19.56,30.35 0 top
U$2  SPARKX-LOGO4  [SPARKX-MEDIUM]  19.56,30.35 0 bottom
U$3  [GND1]  15.75,8.38 90 bottom
U$4  [3#3V2]  18.29,8.38 90 bottom
U$5  [SDA8]  20.83,8.38 90 bottom
U$6  [SCL9]  23.37,8.38 90 bottom
U$7  SPARKX-LOGO4  [SPARKX-MEDIUM]  45.47,30.35 0 bottom
U$8  SPARKX-LOGO4  [SPARKX-MEDIUM]  45.47,30.35 0 top
U$9  [QWIIC_PHT0]  15.11,27.94 0 top
U$10  [(PWR)]  7.49,14.61 0 top
U$11  [(I_SUPER2_C)]  21.46,26.16 0 bottom
U$12  [QWIIC_PHT0]  24,20.19 0 bottom
U$13  [3#3V2]  44.2,8.38 90 top
U$14  [GND1]  41.66,8.38 90 top
U$15  [MS86070]  15.88,25.91 0 top
U$16  [MS86070]  23.24,17.91 0 bottom
U$17  [LED0]  12.32,12.7 0 bottom
U$18  [SCL9]  49.28,8.38 90 top
U$19  [SDA8]  46.74,8.38 90 top
U$20  [GND1]  41.66,8.38 90 bottom
U$21  [3#3V2]  18.29,8.38 90 top
U$22  [GND1]  15.75,8.38 90 top
U$23  [3#3V2]  44.2,8.38 90 bottom
U$24  [SDA8]  46.74,8.38 90 bottom
U$25  [SCL9]  49.28,8.38 90 bottom
U$26  [SCL9]  23.37,8.38 90 top
U$27  [SDA8]  20.83,8.38 90 top
U$28  [(PWR)]  33.4,14.61 0 top
U$29  [(I_SUPER2_C)]  47.37,26.16 0 bottom
U$30  [QWIIC_PHT0]  41.02,27.94 0 top
U$31  [QWIIC_PHT0]  49.91,20.19 0 bottom
U$32  [MS86070]  41.78,25.91 0 top
U$33  [MS86070]  49.15,17.91 0 bottom
U$34  [LED0]  38.23,12.7 0 bottom
U$35  SPARKX-LOGO4  [SPARKX-MEDIUM]  71.37,30.35 0 bottom
U$36  SPARKX-LOGO4  [SPARKX-MEDIUM]  71.37,30.35 0 top
U$37  [3#3V2]  70.1,8.38 90 top
U$38  [GND1]  67.56,8.38 90 top
U$39  [SCL9]  75.18,8.38 90 top
U$40  [SDA8]  72.64,8.38 90 top
U$41  [GND1]  67.56,8.38 90 bottom
U$42  [3#3V2]  70.1,8.38 90 bottom
U$43  [SDA8]  72.64,8.38 90 bottom
U$44  [SCL9]  75.18,8.38 90 bottom
U$45  [(PWR)]  59.31,14.61 0 top
U$46  [(I_SUPER2_C)]  73.28,26.16 0 bottom
U$47  [QWIIC_PHT0]  66.93,27.94 0 top
U$48  [QWIIC_PHT0]  75.82,20.19 0 bottom
U$49  [MS86070]  67.69,25.91 0 top
U$50  [MS86070]  75.06,17.91 0 bottom
U$51  [LED0]  64.14,12.7 0 bottom
U$52  SPARKX-LOGO4  [SPARKX-MEDIUM]  97.28,30.35 0 bottom
U$53  SPARKX-LOGO4  [SPARKX-MEDIUM]  97.28,30.35 0 top
U$54  [3#3V2]  96.01,8.38 90 top
U$55  [GND1]  93.47,8.38 90 top
U$56  [SCL9]  101.09,8.38 90 top
U$57  [SDA8]  98.55,8.38 90 top
U$58  [GND1]  93.47,8.38 90 bottom
U$59  [3#3V2]  96.01,8.38 90 bottom
U$60  [SDA8]  98.55,8.38 90 bottom
U$61  [SCL9]  101.09,8.38 90 bottom
U$62  [(PWR)]  85.22,14.61 0 top
U$63  [(I_SUPER2_C)]  99.19,26.16 0 bottom
U$64  [QWIIC_PHT0]  92.84,27.94 0 top
U$65  [QWIIC_PHT0]  101.73,20.19 0 bottom
U$66  [MS86070]  93.6,25.91 0 top
U$67  [MS86070]  100.97,17.91 0 bottom
U$68  [LED0]  90.04,12.7 0 bottom
U$69  SPARKX-LOGO4  [SPARKX-MEDIUM]  123.19,30.35 0 bottom
U$70  SPARKX-LOGO4  [SPARKX-MEDIUM]  123.19,30.35 0 top
U$71  [3#3V2]  121.92,8.38 90 top
U$72  [GND1]  119.38,8.38 90 top
U$73  [SCL9]  127,8.38 90 top
U$74  [SDA8]  124.46,8.38 90 top
U$75  [GND1]  119.38,8.38 90 bottom
U$76  [3#3V2]  121.92,8.38 90 bottom
U$77  [SDA8]  124.46,8.38 90 bottom
U$78  [SCL9]  127,8.38 90 bottom
U$79  [(PWR)]  111.12,14.61 0 top
U$80  [(I_SUPER2_C)]  125.09,26.16 0 bottom
U$81  [QWIIC_PHT0]  118.75,27.94 0 top
U$82  [QWIIC_PHT0]  127.64,20.19 0 bottom
U$83  [MS86070]  119.51,25.91 0 top
U$84  [MS86070]  126.87,17.91 0 bottom
U$85  [LED0]  115.95,12.7 0 bottom
U$86  SPARKX-LOGO4  [SPARKX-MEDIUM]  19.56,56.26 0 bottom
U$87  SPARKX-LOGO4  [SPARKX-MEDIUM]  19.56,56.26 0 top
U$88  [3#3V2]  18.29,34.29 90 top
U$89  [GND1]  15.75,34.29 90 top
U$90  [SCL9]  23.37,34.29 90 top
U$91  [SDA8]  20.83,34.29 90 top
U$92  [GND1]  15.75,34.29 90 bottom
U$93  [3#3V2]  18.29,34.29 90 bottom
U$94  [SDA8]  20.83,34.29 90 bottom
U$95  [SCL9]  23.37,34.29 90 bottom
U$96  [(PWR)]  7.49,40.51 0 top
U$97  [(I_SUPER2_C)]  21.46,52.07 0 bottom
U$98  [QWIIC_PHT0]  15.11,53.85 0 top
U$99  [QWIIC_PHT0]  24,46.1 0 bottom
U$100  [MS86070]  15.88,51.82 0 top
U$101  [MS86070]  23.24,43.81 0 bottom
U$102  [LED0]  12.32,38.61 0 bottom
U$103  SPARKX-LOGO4  [SPARKX-MEDIUM]  45.47,56.26 0 bottom
U$104  SPARKX-LOGO4  [SPARKX-MEDIUM]  45.47,56.26 0 top
U$105  [3#3V2]  44.2,34.29 90 top
U$106  [GND1]  41.66,34.29 90 top
U$107  [SCL9]  49.28,34.29 90 top
U$108  [SDA8]  46.74,34.29 90 top
U$109  [GND1]  41.66,34.29 90 bottom
U$110  [3#3V2]  44.2,34.29 90 bottom
U$111  [SDA8]  46.74,34.29 90 bottom
U$112  [SCL9]  49.28,34.29 90 bottom
U$113  [(PWR)]  33.4,40.51 0 top
U$114  [(I_SUPER2_C)]  47.37,52.07 0 bottom
U$115  [QWIIC_PHT0]  41.02,53.85 0 top
U$116  [QWIIC_PHT0]  49.91,46.1 0 bottom
U$117  [MS86070]  41.78,51.82 0 top
U$118  [MS86070]  49.15,43.81 0 bottom
U$119  [LED0]  38.23,38.61 0 bottom
U$120  SPARKX-LOGO4  [SPARKX-MEDIUM]  71.37,56.26 0 bottom
U$121  SPARKX-LOGO4  [SPARKX-MEDIUM]  71.37,56.26 0 top
U$122  [3#3V2]  70.1,34.29 90 top
U$123  [GND1]  67.56,34.29 90 top
U$124  [SCL9]  75.18,34.29 90 top
U$125  [SDA8]  72.64,34.29 90 top
U$126  [GND1]  67.56,34.29 90 bottom
U$127  [3#3V2]  70.1,34.29 90 bottom
U$128  [SDA8]  72.64,34.29 90 bottom
U$129  [SCL9]  75.18,34.29 90 bottom
U$130  [(PWR)]  59.31,40.51 0 top
U$131  [(I_SUPER2_C)]  73.28,52.07 0 bottom
U$132  [QWIIC_PHT0]  66.93,53.85 0 top
U$133  [QWIIC_PHT0]  75.82,46.1 0 bottom
U$134  [MS86070]  67.69,51.82 0 top
U$135  [MS86070]  75.06,43.81 0 bottom
U$136  [LED0]  64.14,38.61 0 bottom
U$137  SPARKX-LOGO4  [SPARKX-MEDIUM]  97.28,56.26 0 bottom
U$138  SPARKX-LOGO4  [SPARKX-MEDIUM]  97.28,56.26 0 top
U$139  [3#3V2]  96.01,34.29 90 top
U$140  [GND1]  93.47,34.29 90 top
U$141  [SCL9]  101.09,34.29 90 top
U$142  [SDA8]  98.55,34.29 90 top
U$143  [GND1]  93.47,34.29 90 bottom
U$144  [3#3V2]  96.01,34.29 90 bottom
U$145  [SDA8]  98.55,34.29 90 bottom
U$146  [SCL9]  101.09,34.29 90 bottom
U$147  [(PWR)]  85.22,40.51 0 top
U$148  [(I_SUPER2_C)]  99.19,52.07 0 bottom
U$149  [QWIIC_PHT0]  92.84,53.85 0 top
U$150  [QWIIC_PHT0]  101.73,46.1 0 bottom
U$151  [MS86070]  93.6,51.82 0 top
U$152  [MS86070]  100.97,43.81 0 bottom
U$153  [LED0]  90.04,38.61 0 bottom
U$154  SPARKX-LOGO4  [SPARKX-MEDIUM]  123.19,56.26 0 bottom
U$155  SPARKX-LOGO4  [SPARKX-MEDIUM]  123.19,56.26 0 top
U$156  [3#3V2]  121.92,34.29 90 top
U$157  [GND1]  119.38,34.29 90 top
U$158  [SCL9]  127,34.29 90 top
U$159  [SDA8]  124.46,34.29 90 top
U$160  [GND1]  119.38,34.29 90 bottom
U$161  [3#3V2]  121.92,34.29 90 bottom
U$162  [SDA8]  124.46,34.29 90 bottom
U$163  [SCL9]  127,34.29 90 bottom
U$164  [(PWR)]  111.12,40.51 0 top
U$165  [(I_SUPER2_C)]  125.09,52.07 0 bottom
U$166  [QWIIC_PHT0]  118.75,53.85 0 top
U$167  [QWIIC_PHT0]  127.64,46.1 0 bottom
U$168  [MS86070]  119.51,51.82 0 top
U$169  [MS86070]  126.87,43.81 0 bottom
U$170  [LED0]  115.95,38.61 0 bottom
U$171  SPARKX-LOGO4  [SPARKX-MEDIUM]  19.56,82.17 0 bottom
U$172  SPARKX-LOGO4  [SPARKX-MEDIUM]  19.56,82.17 0 top
U$173  [3#3V2]  18.29,60.2 90 top
U$174  [GND1]  15.75,60.2 90 top
U$175  [SCL9]  23.37,60.2 90 top
U$176  [SDA8]  20.83,60.2 90 top
U$177  [GND1]  15.75,60.2 90 bottom
U$178  [3#3V2]  18.29,60.2 90 bottom
U$179  [SDA8]  20.83,60.2 90 bottom
U$180  [SCL9]  23.37,60.2 90 bottom
U$181  [(PWR)]  7.49,66.42 0 top
U$182  [(I_SUPER2_C)]  21.46,77.98 0 bottom
U$183  [QWIIC_PHT0]  15.11,79.76 0 top
U$184  [QWIIC_PHT0]  24,72.01 0 bottom
U$185  [MS86070]  15.88,77.72 0 top
U$186  [MS86070]  23.24,69.72 0 bottom
U$187  [LED0]  12.32,64.52 0 bottom
U$188  SPARKX-LOGO4  [SPARKX-MEDIUM]  45.47,82.17 0 bottom
U$189  SPARKX-LOGO4  [SPARKX-MEDIUM]  45.47,82.17 0 top
U$190  [3#3V2]  44.2,60.2 90 top
U$191  [GND1]  41.66,60.2 90 top
U$192  [SCL9]  49.28,60.2 90 top
U$193  [SDA8]  46.74,60.2 90 top
U$194  [GND1]  41.66,60.2 90 bottom
U$195  [3#3V2]  44.2,60.2 90 bottom
U$196  [SDA8]  46.74,60.2 90 bottom
U$197  [SCL9]  49.28,60.2 90 bottom
U$198  [(PWR)]  33.4,66.42 0 top
U$199  [(I_SUPER2_C)]  47.37,77.98 0 bottom
U$200  [QWIIC_PHT0]  41.02,79.76 0 top
U$201  [QWIIC_PHT0]  49.91,72.01 0 bottom
U$202  [MS86070]  41.78,77.72 0 top
U$203  [MS86070]  49.15,69.72 0 bottom
U$204  [LED0]  38.23,64.52 0 bottom
U$205  SPARKX-LOGO4  [SPARKX-MEDIUM]  71.37,82.17 0 bottom
U$206  SPARKX-LOGO4  [SPARKX-MEDIUM]  71.37,82.17 0 top
U$207  [3#3V2]  70.1,60.2 90 top
U$208  [GND1]  67.56,60.2 90 top
U$209  [SCL9]  75.18,60.2 90 top
U$210  [SDA8]  72.64,60.2 90 top
U$211  [GND1]  67.56,60.2 90 bottom
U$212  [3#3V2]  70.1,60.2 90 bottom
U$213  [SDA8]  72.64,60.2 90 bottom
U$214  [SCL9]  75.18,60.2 90 bottom
U$215  [(PWR)]  59.31,66.42 0 top
U$216  [(I_SUPER2_C)]  73.28,77.98 0 bottom
U$217  [QWIIC_PHT0]  66.93,79.76 0 top
U$218  [QWIIC_PHT0]  75.82,72.01 0 bottom
U$219  [MS86070]  67.69,77.72 0 top
U$220  [MS86070]  75.06,69.72 0 bottom
U$221  [LED0]  64.14,64.52 0 bottom
U$222  SPARKX-LOGO4  [SPARKX-MEDIUM]  97.28,82.17 0 bottom
U$223  SPARKX-LOGO4  [SPARKX-MEDIUM]  97.28,82.17 0 top
U$224  [3#3V2]  96.01,60.2 90 top
U$225  [GND1]  93.47,60.2 90 top
U$226  [SCL9]  101.09,60.2 90 top
U$227  [SDA8]  98.55,60.2 90 top
U$228  [GND1]  93.47,60.2 90 bottom
U$229  [3#3V2]  96.01,60.2 90 bottom
U$230  [SDA8]  98.55,60.2 90 bottom
U$231  [SCL9]  101.09,60.2 90 bottom
U$232  [(PWR)]  85.22,66.42 0 top
U$233  [(I_SUPER2_C)]  99.19,77.98 0 bottom
U$234  [QWIIC_PHT0]  92.84,79.76 0 top
U$235  [QWIIC_PHT0]  101.73,72.01 0 bottom
U$236  [MS86070]  93.6,77.72 0 top
U$237  [MS86070]  100.97,69.72 0 bottom
U$238  [LED0]  90.04,64.52 0 bottom
U$239  SPARKX-LOGO4  [SPARKX-MEDIUM]  123.19,82.17 0 bottom
U$240  SPARKX-LOGO4  [SPARKX-MEDIUM]  123.19,82.17 0 top
U$241  [3#3V2]  121.92,60.2 90 top
U$242  [GND1]  119.38,60.2 90 top
U$243  [SCL9]  127,60.2 90 top
U$244  [SDA8]  124.46,60.2 90 top
U$245  [GND1]  119.38,60.2 90 bottom
U$246  [3#3V2]  121.92,60.2 90 bottom
U$247  [SDA8]  124.46,60.2 90 bottom
U$248  [SCL9]  127,60.2 90 bottom
U$249  [(PWR)]  111.12,66.42 0 top
U$250  [(I_SUPER2_C)]  125.09,77.98 0 bottom
U$251  [QWIIC_PHT0]  118.75,79.76 0 top
U$252  [QWIIC_PHT0]  127.64,72.01 0 bottom
U$253  [MS86070]  119.51,77.72 0 top
U$254  [MS86070]  126.87,69.72 0 bottom
U$255  [LED0]  115.95,64.52 0 bottom
U$256  SPARKX-LOGO4  [SPARKX-MEDIUM]  19.56,108.08 0 bottom
U$257  SPARKX-LOGO4  [SPARKX-MEDIUM]  19.56,108.08 0 top
U$258  [3#3V2]  18.29,86.11 90 top
U$259  [GND1]  15.75,86.11 90 top
U$260  [SCL9]  23.37,86.11 90 top
U$261  [SDA8]  20.83,86.11 90 top
U$262  [GND1]  15.75,86.11 90 bottom
U$263  [3#3V2]  18.29,86.11 90 bottom
U$264  [SDA8]  20.83,86.11 90 bottom
U$265  [SCL9]  23.37,86.11 90 bottom
U$266  [(PWR)]  7.49,92.33 0 top
U$267  [(I_SUPER2_C)]  21.46,103.89 0 bottom
U$268  [QWIIC_PHT0]  15.11,105.66 0 top
U$269  [QWIIC_PHT0]  24,97.92 0 bottom
U$270  [MS86070]  15.88,103.63 0 top
U$271  [MS86070]  23.24,95.63 0 bottom
U$272  [LED0]  12.32,90.42 0 bottom
U$273  SPARKX-LOGO4  [SPARKX-MEDIUM]  45.47,108.08 0 bottom
U$274  SPARKX-LOGO4  [SPARKX-MEDIUM]  45.47,108.08 0 top
U$275  [3#3V2]  44.2,86.11 90 top
U$276  [GND1]  41.66,86.11 90 top
U$277  [SCL9]  49.28,86.11 90 top
U$278  [SDA8]  46.74,86.11 90 top
U$279  [GND1]  41.66,86.11 90 bottom
U$280  [3#3V2]  44.2,86.11 90 bottom
U$281  [SDA8]  46.74,86.11 90 bottom
U$282  [SCL9]  49.28,86.11 90 bottom
U$283  [(PWR)]  33.4,92.33 0 top
U$284  [(I_SUPER2_C)]  47.37,103.89 0 bottom
U$285  [QWIIC_PHT0]  41.02,105.66 0 top
U$286  [QWIIC_PHT0]  49.91,97.92 0 bottom
U$287  [MS86070]  41.78,103.63 0 top
U$288  [MS86070]  49.15,95.63 0 bottom
U$289  [LED0]  38.23,90.42 0 bottom
U$290  SPARKX-LOGO4  [SPARKX-MEDIUM]  71.37,108.08 0 bottom
U$291  SPARKX-LOGO4  [SPARKX-MEDIUM]  71.37,108.08 0 top
U$292  [3#3V2]  70.1,86.11 90 top
U$293  [GND1]  67.56,86.11 90 top
U$294  [SCL9]  75.18,86.11 90 top
U$295  [SDA8]  72.64,86.11 90 top
U$296  [GND1]  67.56,86.11 90 bottom
U$297  [3#3V2]  70.1,86.11 90 bottom
U$298  [SDA8]  72.64,86.11 90 bottom
U$299  [SCL9]  75.18,86.11 90 bottom
U$300  [(PWR)]  59.31,92.33 0 top
U$301  [(I_SUPER2_C)]  73.28,103.89 0 bottom
U$302  [QWIIC_PHT0]  66.93,105.66 0 top
U$303  [QWIIC_PHT0]  75.82,97.92 0 bottom
U$304  [MS86070]  67.69,103.63 0 top
U$305  [MS86070]  75.06,95.63 0 bottom
U$306  [LED0]  64.14,90.42 0 bottom
U$307  SPARKX-LOGO4  [SPARKX-MEDIUM]  97.28,108.08 0 bottom
U$308  SPARKX-LOGO4  [SPARKX-MEDIUM]  97.28,108.08 0 top
U$309  [3#3V2]  96.01,86.11 90 top
U$310  [GND1]  93.47,86.11 90 top
U$311  [SCL9]  101.09,86.11 90 top
U$312  [SDA8]  98.55,86.11 90 top
U$313  [GND1]  93.47,86.11 90 bottom
U$314  [3#3V2]  96.01,86.11 90 bottom
U$315  [SDA8]  98.55,86.11 90 bottom
U$316  [SCL9]  101.09,86.11 90 bottom
U$317  [(PWR)]  85.22,92.33 0 top
U$318  [(I_SUPER2_C)]  99.19,103.89 0 bottom
U$319  [QWIIC_PHT0]  92.84,105.66 0 top
U$320  [QWIIC_PHT0]  101.73,97.92 0 bottom
U$321  [MS86070]  93.6,103.63 0 top
U$322  [MS86070]  100.97,95.63 0 bottom
U$323  [LED0]  90.04,90.42 0 bottom
U$324  SPARKX-LOGO4  [SPARKX-MEDIUM]  123.19,108.08 0 bottom
U$325  SPARKX-LOGO4  [SPARKX-MEDIUM]  123.19,108.08 0 top
U$326  [3#3V2]  121.92,86.11 90 top
U$327  [GND1]  119.38,86.11 90 top
U$328  [SCL9]  127,86.11 90 top
U$329  [SDA8]  124.46,86.11 90 top
U$330  [GND1]  119.38,86.11 90 bottom
U$331  [3#3V2]  121.92,86.11 90 bottom
U$332  [SDA8]  124.46,86.11 90 bottom
U$333  [SCL9]  127,86.11 90 bottom
U$334  [(PWR)]  111.12,92.33 0 top
U$335  [(I_SUPER2_C)]  125.09,103.89 0 bottom
U$336  [QWIIC_PHT0]  118.75,105.66 0 top
U$337  [QWIIC_PHT0]  127.64,97.92 0 bottom
U$338  [MS86070]  119.51,103.63 0 top
U$339  [MS86070]  126.87,95.63 0 bottom
U$340  [LED0]  115.95,90.42 0 bottom
U$341  SPARKX-LOGO4  [SPARKX-MEDIUM]  19.56,133.98 0 bottom
U$342  SPARKX-LOGO4  [SPARKX-MEDIUM]  19.56,133.98 0 top
U$343  [3#3V2]  18.29,112.01 90 top
U$344  [GND1]  15.75,112.01 90 top
U$345  [SCL9]  23.37,112.01 90 top
U$346  [SDA8]  20.83,112.01 90 top
U$347  [GND1]  15.75,112.01 90 bottom
U$348  [3#3V2]  18.29,112.01 90 bottom
U$349  [SDA8]  20.83,112.01 90 bottom
U$350  [SCL9]  23.37,112.01 90 bottom
U$351  [(PWR)]  7.49,118.24 0 top
U$352  [(I_SUPER2_C)]  21.46,129.79 0 bottom
U$353  [QWIIC_PHT0]  15.11,131.57 0 top
U$354  [QWIIC_PHT0]  24,123.83 0 bottom
U$355  [MS86070]  15.88,129.54 0 top
U$356  [MS86070]  23.24,121.54 0 bottom
U$357  [LED0]  12.32,116.33 0 bottom
U$358  SPARKX-LOGO4  [SPARKX-MEDIUM]  45.47,133.98 0 bottom
U$359  SPARKX-LOGO4  [SPARKX-MEDIUM]  45.47,133.98 0 top
U$360  [3#3V2]  44.2,112.01 90 top
U$361  [GND1]  41.66,112.01 90 top
U$362  [SCL9]  49.28,112.01 90 top
U$363  [SDA8]  46.74,112.01 90 top
U$364  [GND1]  41.66,112.01 90 bottom
U$365  [3#3V2]  44.2,112.01 90 bottom
U$366  [SDA8]  46.74,112.01 90 bottom
U$367  [SCL9]  49.28,112.01 90 bottom
U$368  [(PWR)]  33.4,118.24 0 top
U$369  [(I_SUPER2_C)]  47.37,129.79 0 bottom
U$370  [QWIIC_PHT0]  41.02,131.57 0 top
U$371  [QWIIC_PHT0]  49.91,123.83 0 bottom
U$372  [MS86070]  41.78,129.54 0 top
U$373  [MS86070]  49.15,121.54 0 bottom
U$374  [LED0]  38.23,116.33 0 bottom
U$375  SPARKX-LOGO4  [SPARKX-MEDIUM]  71.37,133.98 0 bottom
U$376  SPARKX-LOGO4  [SPARKX-MEDIUM]  71.37,133.98 0 top
U$377  [3#3V2]  70.1,112.01 90 top
U$378  [GND1]  67.56,112.01 90 top
U$379  [SCL9]  75.18,112.01 90 top
U$380  [SDA8]  72.64,112.01 90 top
U$381  [GND1]  67.56,112.01 90 bottom
U$382  [3#3V2]  70.1,112.01 90 bottom
U$383  [SDA8]  72.64,112.01 90 bottom
U$384  [SCL9]  75.18,112.01 90 bottom
U$385  [(PWR)]  59.31,118.24 0 top
U$386  [(I_SUPER2_C)]  73.28,129.79 0 bottom
U$387  [QWIIC_PHT0]  66.93,131.57 0 top
U$388  [QWIIC_PHT0]  75.82,123.83 0 bottom
U$389  [MS86070]  67.69,129.54 0 top
U$390  [MS86070]  75.06,121.54 0 bottom
U$391  [LED0]  64.14,116.33 0 bottom
U$392  SPARKX-LOGO4  [SPARKX-MEDIUM]  97.28,133.98 0 bottom
U$393  SPARKX-LOGO4  [SPARKX-MEDIUM]  97.28,133.98 0 top
U$394  [3#3V2]  96.01,112.01 90 top
U$395  [GND1]  93.47,112.01 90 top
U$396  [SCL9]  101.09,112.01 90 top
U$397  [SDA8]  98.55,112.01 90 top
U$398  [GND1]  93.47,112.01 90 bottom
U$399  [3#3V2]  96.01,112.01 90 bottom
U$400  [SDA8]  98.55,112.01 90 bottom
U$401  [SCL9]  101.09,112.01 90 bottom
U$402  [(PWR)]  85.22,118.24 0 top
U$403  [(I_SUPER2_C)]  99.19,129.79 0 bottom
U$404  [QWIIC_PHT0]  92.84,131.57 0 top
U$405  [QWIIC_PHT0]  101.73,123.83 0 bottom
U$406  [MS86070]  93.6,129.54 0 top
U$407  [MS86070]  100.97,121.54 0 bottom
U$408  [LED0]  90.04,116.33 0 bottom
U$409  SPARKX-LOGO4  [SPARKX-MEDIUM]  123.19,133.98 0 bottom
U$410  SPARKX-LOGO4  [SPARKX-MEDIUM]  123.19,133.98 0 top
U$411  [3#3V2]  121.92,112.01 90 top
U$412  [GND1]  119.38,112.01 90 top
U$413  [SCL9]  127,112.01 90 top
U$414  [SDA8]  124.46,112.01 90 top
U$415  [GND1]  119.38,112.01 90 bottom
U$416  [3#3V2]  121.92,112.01 90 bottom
U$417  [SDA8]  124.46,112.01 90 bottom
U$418  [SCL9]  127,112.01 90 bottom
U$419  [(PWR)]  111.12,118.24 0 top
U$420  [(I_SUPER2_C)]  125.09,129.79 0 bottom
U$421  [QWIIC_PHT0]  118.75,131.57 0 top
U$422  [QWIIC_PHT0]  127.64,123.83 0 bottom
U$423  [MS86070]  119.51,129.54 0 top
U$424  [MS86070]  126.87,121.54 0 bottom
U$425  [LED0]  115.95,116.33 0 bottom

## Library data of the parts
C1-C25 = SparkFun-Capacitors; PROD_ID: CAP-07822
D1-D25 = SparkFun-LED; PROD_ID: DIO-00819
E$1 E$2 LOGO1-LOGO25 = SparkFun-Aesthetics
E$3 = SparkFun-Retired
I2C I2C1-I2C24 LED LED1-LED24 = SparkFun-Jumpers
J1 J2 J4 J6 J7 J9 J10 J12 J13 J15 J16 J18 J19 J21 J22 J24 J25 J27 J28 J30 J31 J33 J34 J36 J37 J39 J40 J42 J43 J45 J46 J48 J49 J51 J52 J54 J55 J57 J58 J60 J61 J63 J64 J66 J67 J69 J70 J72 J73 J75 = SparkFun-Connectors; PROD_ID: CONN-13694
J3 J5 J8 J11 J14 J17 J20 J23 J26 J29 J32 J35 J38 J41 J44 J47 J50 J53 J56 J59 J62 J65 J68 J71 J74 U$1 U$2 U$7 U$8 U$35 U$36 U$52 U$53 U$69 U$70 U$86 U$87 U$103 U$104 U$120 U$121 U$137 U$138 U$154 U$155 U$171 U$172 U$188 U$189 U$205 U$206 U$222 U$223 U$239 U$240 U$256 U$257 U$273 U$274 U$290 U$291 U$307 U$308 U$324 U$325 U$341 U$342 U$358 U$359 U$375 U$376 U$392 U$393 U$409 U$410 = SparkX
JP1-JP150 = SparkFun
R1 R6 R9 R12 R15 R18 R21 R24 R27 R30 R33 R36 R39 R42 R45 R48 R51 R54 R57 R60 R63 R66 R69 R72 R75 = SparkFun-Resistors; PROD_ID: RES-07856
R2-R5 R7 R8 R10 R11 R13 R14 R16 R17 R19 R20 R22 R23 R25 R26 R28 R29 R31 R32 R34 R35 R37 R38 R40 R41 R43 R44 R46 R47 R49 R50 R52 R53 R55 R56 R58 R59 R61 R62 R64 R65 R67 R68 R70 R71 R73 R74 = SparkFun-Resistors; PROD_ID: RES-08272
U1-U25 = Qwiic PHT Sensor - MS8607; DESCRIPTION: PHT Combination Sensor; HEIGHT: mm; MANUFACTURER_NAME: TE Connectivity; MANUFACTURER_PART_NUMBER: MS8607-02BA01
U$3-U$6 U$10 U$11 U$13 U$14 U$18-U$29 U$37-U$46 U$54-U$63 U$71-U$80 U$88-U$97 U$105-U$114 U$122-U$131 U$139-U$148 U$156-U$165 U$173-U$182 U$190-U$199 U$207-U$216 U$224-U$233 U$241-U$250 U$258-U$267 U$275-U$284 U$292-U$301 U$309-U$318 U$326-U$335 U$343-U$352 U$360-U$369 U$377-U$386 U$394-U$403 U$411-U$420 = Labels-0_04
U$9 U$12 U$30 U$31 U$47 U$48 U$64 U$65 U$81 U$82 U$98 U$99 U$115 U$116 U$132 U$133 U$149 U$150 U$166 U$167 U$183 U$184 U$200 U$201 U$217 U$218 U$234 U$235 U$251 U$252 U$268 U$269 U$285 U$286 U$302 U$303 U$319 U$320 U$336 U$337 U$353 U$354 U$370 U$371 U$387 U$388 U$404 U$405 U$421 U$422 = Qwiic_Pressure
U$15 U$16 U$32 U$33 U$49 U$50 U$66 U$67 U$83 U$84 U$100 U$101 U$117 U$118 U$134 U$135 U$151 U$152 U$168 U$169 U$185 U$186 U$202 U$203 U$219 U$220 U$236 U$237 U$253 U$254 U$270 U$271 U$287 U$288 U$304 U$305 U$321 U$322 U$338 U$339 U$355 U$356 U$372 U$373 U$389 U$390 U$406 U$407 U$423 U$424 = MS8607
U$17 U$34 U$51 U$68 U$85 U$102 U$119 U$136 U$153 U$170 U$187 U$204 U$221 U$238 U$255 U$272 U$289 U$306 U$323 U$340 U$357 U$374 U$391 U$408 U$425 = LED